# Altium PCB NewPCB1.PcbDoc (part 1 of 2)
Units mil, origin at the board's own origin, x right, y up, seen from the top; angles counter-clockwise.
Board outline 6000 x 4000 mil, 2 copper layers (Top Layer, Bottom Layer); 429 components, 190 nets, 1158 pads, 636 vias.
Unrouted connection lines stored in the file: 845.
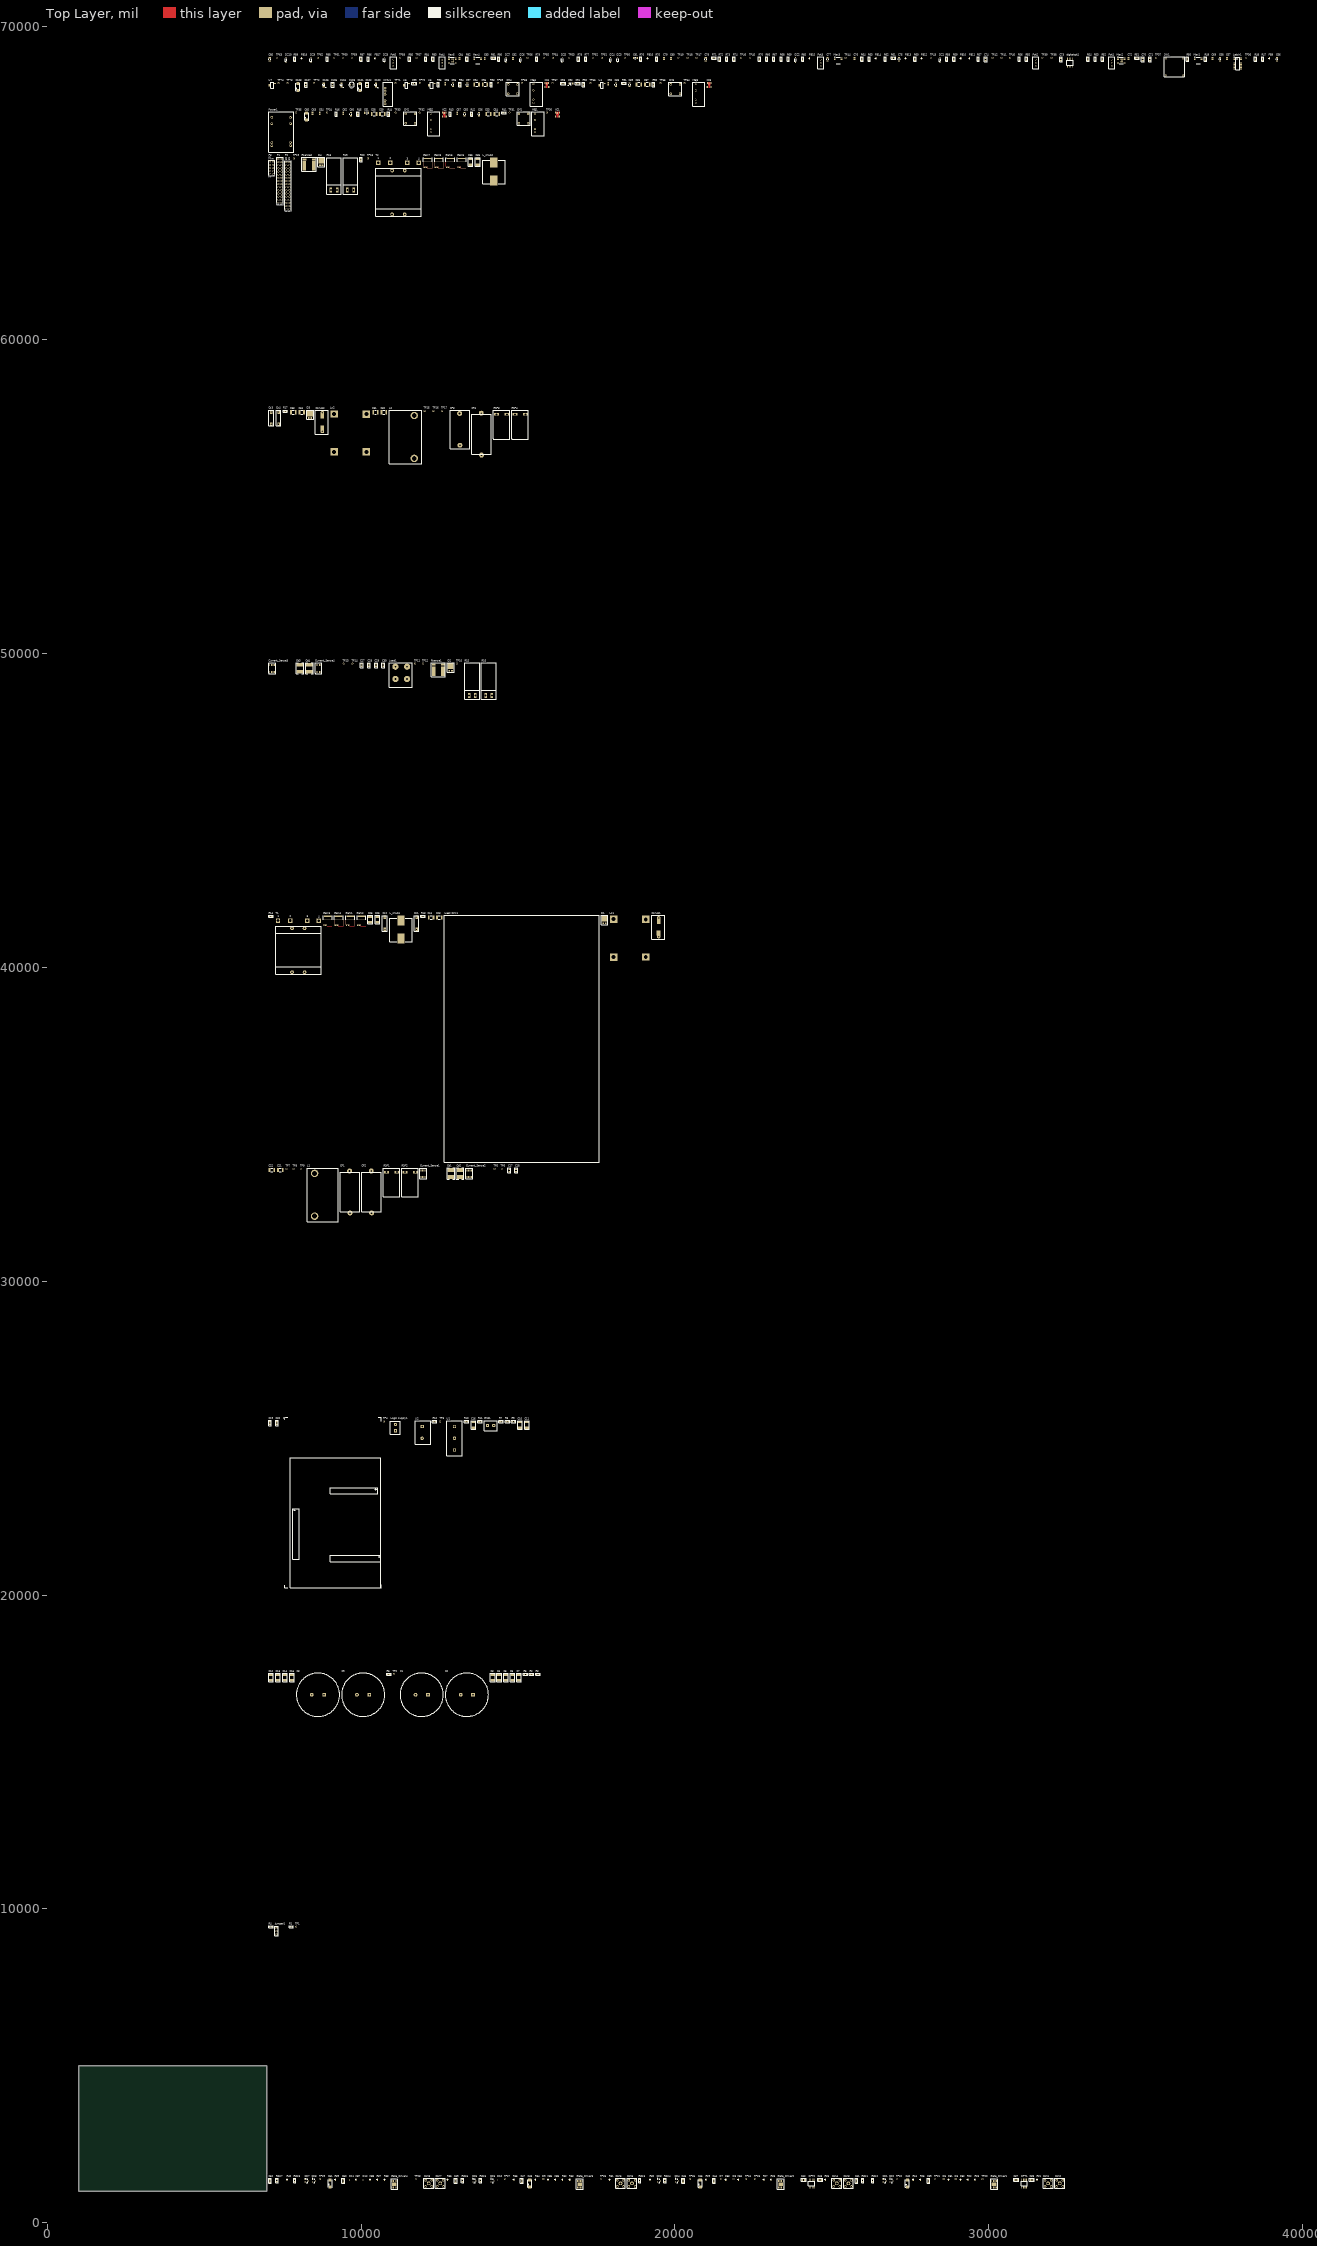
[diagram p0: Top Layer view]
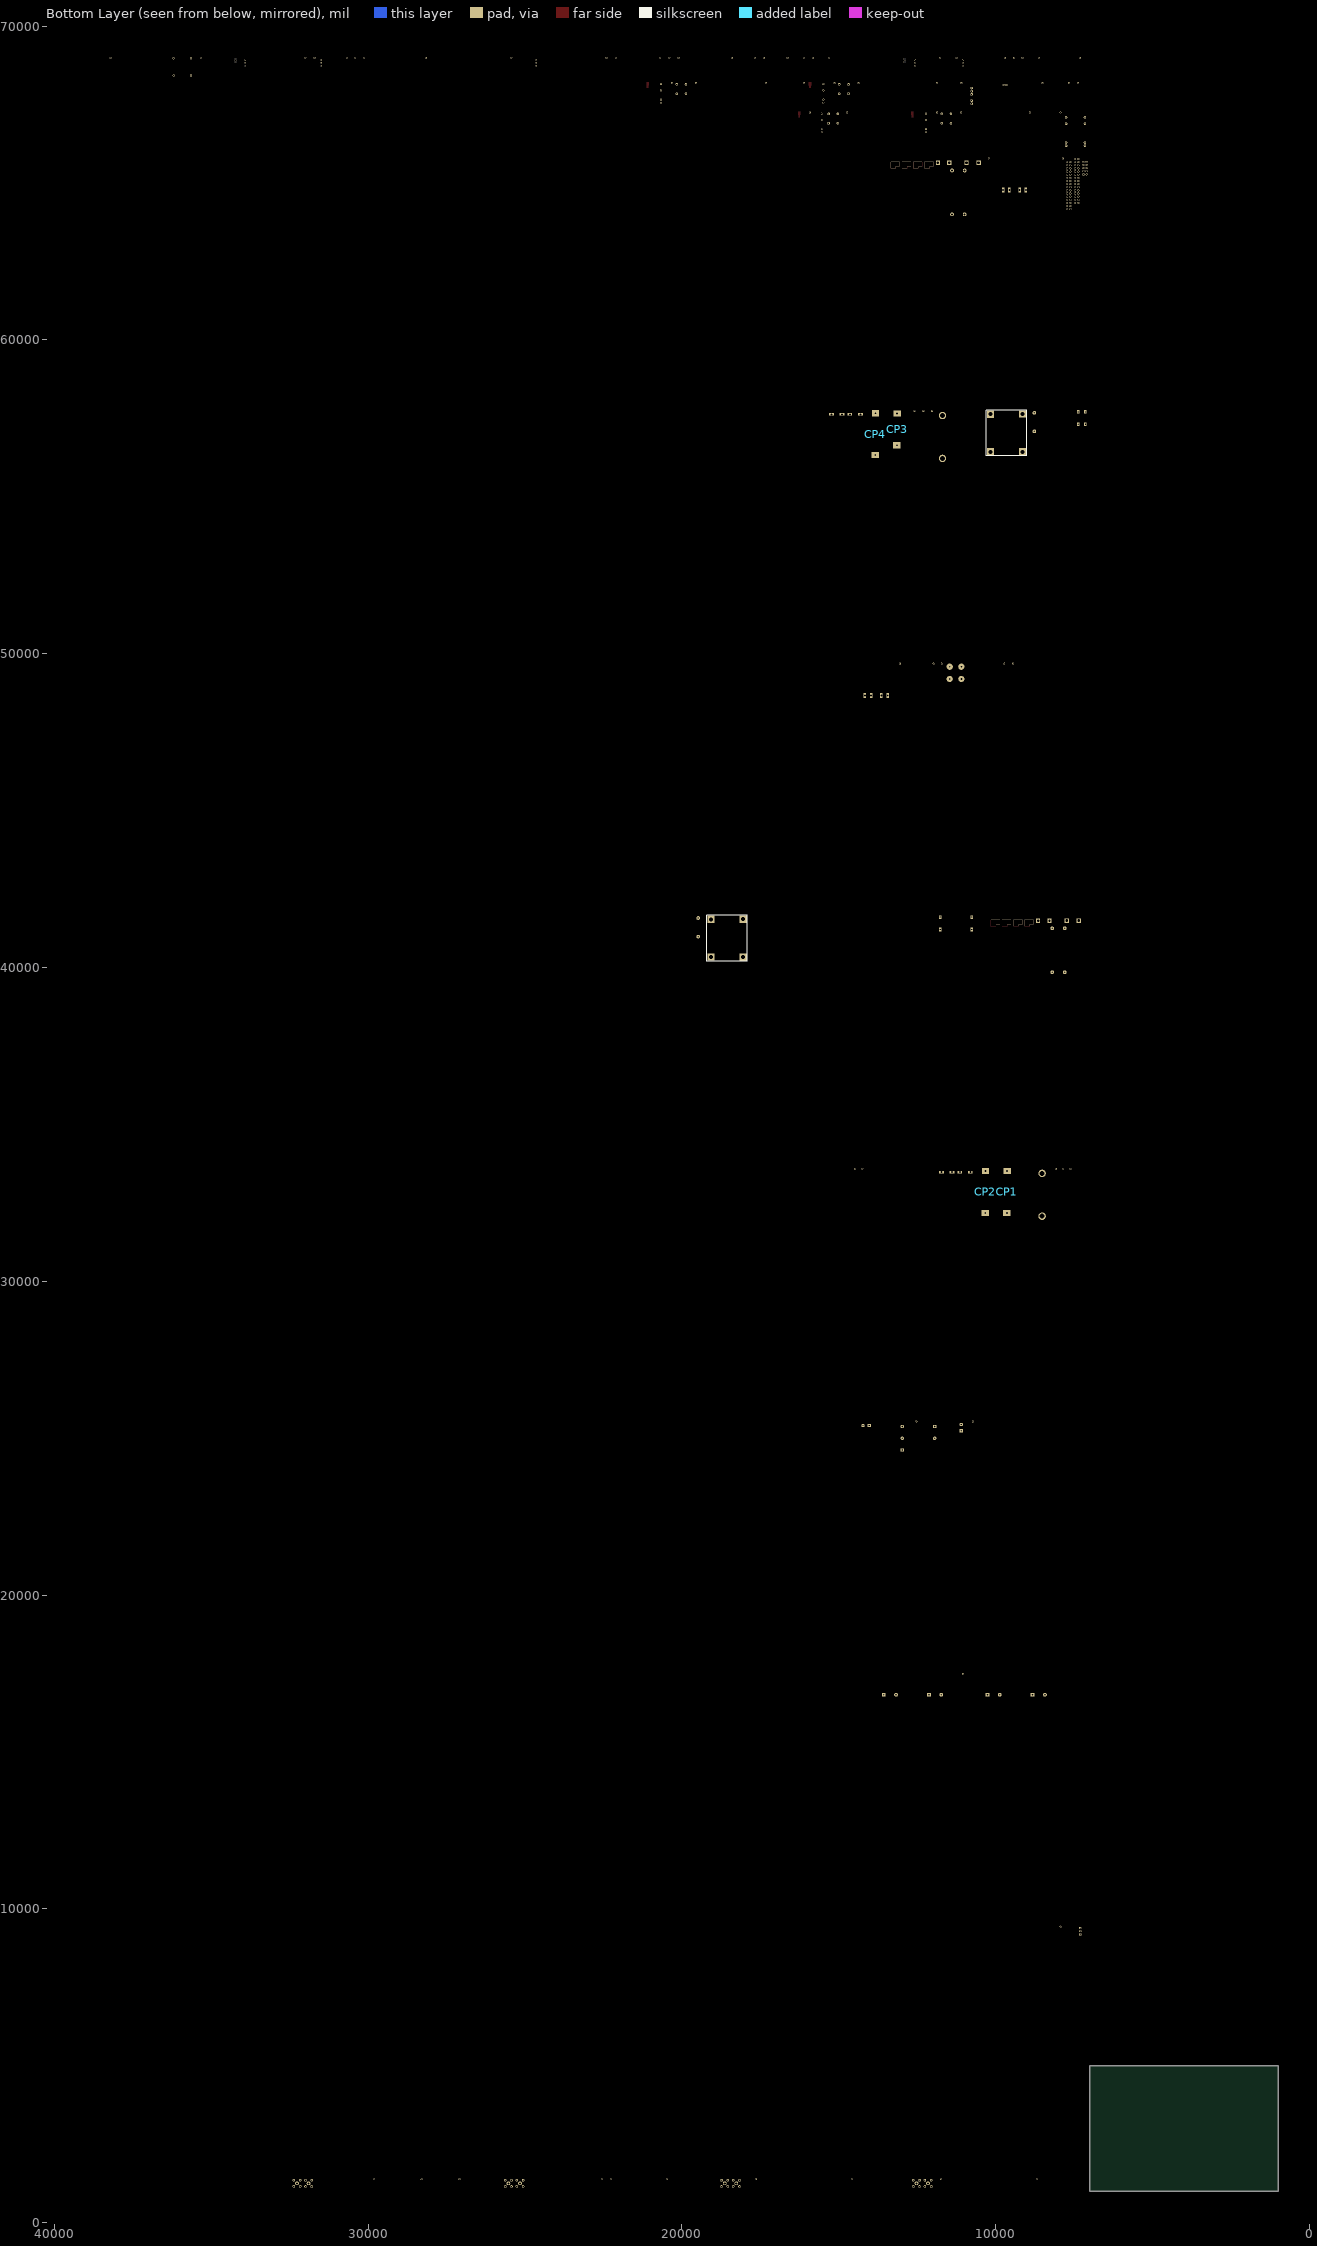
[diagram p1: Bottom Layer view, seen from below]

## Layer stack, top to bottom
Top Solder: solder mask 0.4, Solder Resist, Dk 3.5
Top Layer: signal copper 1.4
Dielectric 1: dielectric 12.6, FR-4, Dk 4.8
Bottom Layer: signal copper 1.4
Bottom Solder: solder mask 0.4, Solder Resist, Dk 3.5

## Board outline
1000,1000 7000,1000 7000,5000 1000,5000

## Design rules (kind name [scope] priority, off if disabled: settings)
Clearance [All] p1: gap=10 ignorepadtopadclearanceinfootprint=FALSE except(0: Arc-Hole Track-Hole SMDPad-Hole THPad-Hole Via-Hole Fill-Hole Poly-Hole Region-Hole Text-Hole)
PolygonConnect [All] p1: connectstyle=Relief reliefconductorwidth=10 reliefentries=4 polygonreliefangle="90 Angle" airgapwidth=10
RoomDefinition Protection_logic [InComponentClass('Protection_logic')] p1: confinementstyle=ConfineIn formatcopy=TRUE lockcomponents=FALSE outline 7045,68375 39340,68375 39340,69130 7045,69130
RoomDefinition Power_Supply [InComponentClass('Power_Supply')] p2: confinementstyle=ConfineIn formatcopy=TRUE lockcomponents=FALSE outline 7045,65975 16350,65975 16350,67385 7045,67385
RoomDefinition Power_Supply2 [InComponentClass('Power_Supply2')] p3: confinementstyle=ConfineIn formatcopy=TRUE lockcomponents=FALSE outline 7045,67430 21200,67430 21200,68325 7045,68325
RoomDefinition Power_Board [InComponentClass('Power_Board')] p4: confinementstyle=ConfineIn formatcopy=TRUE lockcomponents=FALSE outline 7045,9130 19685,9130 19685,65925 7045,65925
RoomDefinition Gate_Drivers [InComponentClass('Gate_Drivers')] p5: confinementstyle=ConfineIn formatcopy=TRUE lockcomponents=FALSE outline 7045,1055 32430,1055 32430,1525 7045,1525
RoutingVias [All] p1: holewidth=28 width=50 viastyle="Through Hole" minholewidth=28 minwidth=50 maxholewidth=28 maxwidth=50
SolderMaskExpansion [All] p1: expansion=4
Width [All] p1: maxlimit=10 minlimit=10 preferedwidth=10
30 further rules are at their usual default settings.

## Classes and differential pairs
component class Protection_logic: 2 3 C66 C67 C68 C69 C70 C71 C72 C73 C74 C75 C76 C77 C78 C79 C80 C81 C82 C83 C84 C85 digitalopt1 DZ1 DZ2 DZ3 DZ4 DZ5 DZ6 DZ7 DZ8 DZ9 DZ10 FB9 FB10 FB11 FB12 FB13 FB14 FB15 FB16 FB17 FB18 Latch1 Max1 Max2 Max3 Max4 Max5 Pot1 Pot2 Pot3 Pot4 Pot5 R47 R48 R49 R50 R51 R52 R53 R54 R55 R56 R57 R58 R59 R60 R61 R62 R63 R64 R65 R66 R67 R68 R69 R70 R71 R72 R73 R74 R75 R76 R77 R78 R79 R80 R81 R82 R83 R84 R85 R86 R87 R88 R89 SW1 TP36 TP37 TP38 TP39 TP40 TP41 TP42 TP43 TP44 TP45 TP46 TP47 TP48 TP49 TP50 TP51 TP52 TP53 TP54 TP55 TP56 TP57 TP58 TP59 TP60 TP61 TP62 TP63 U3
component class Power_Supply: C53 C54 C55 C56 C57 C58 C59 C60 C61 C62 C63 C64 C65 CM1 CM2 MEJ1 MEJ2 Power1 R41 R42 R43 R44 R45 R46 TP30 TP31 TP32 TP33 TP34 TP35 XC1 XC2
component class Power_Supply2: C86 C87 C88 C89 C90 C91 C92 C93 C94 C95 C96 C97 C98 C99 C100 C101 C102 C103 C104 C105 C106 C107 C108 CM3 CM4 MEJ3 MEJ4 NMH1 R90 R91 R92 R93 R94 R95 TP64 TP65 TP66 TP67 TP68 TP69 TP70 TP71 TP72 TP73 TP74 U4 U5 U6 U7 XC3 XC4
component class Power_Board: 1 C1 C2 C3 C4 C5 C6 C7 C8 C9 C10 C11 C12 C13 C14 C15 C16 C17 C18 C19 C20 C21 C22 C23 C24 C25 C26 C27 C28 C29 C30 C31 C32 C33 C34 C35 C36 Cd1 Cd2 Cd3 Cd4 CP1 CP2 CP3 CP4 Cs1 Cs2 Cs3 Cs4 Csnub1 Csnub2 Current_Sense1 Current_Sense2 Current_Sense3 Current_Sense4 D1 D2 D3 D4 GaN1 GaN2 GaN3 GaN4 GaN5 GaN6 GaN7 GaN8 Grid1 "Heat Sink1" Jumper1 L1 L2 L_snub1 L_snub2 Load1 "Logic supply1" Ls1 Ls2 P1 P2 P3 R1 R2 R3 R4 R5 R6 R7 R8 R9 R10 R11 R12 R13 R14 R15 R16 R17 R18 R19 R20 Rsense1 Rsense2 RSP1 RSP2 RSP3 RSP4 T1 T2 TP1 TP2 TP3 TP4 TP5 TP6 TP7 TP8 TP9 TP10 TP11 TP12 TP13 TP14 TP15 TP16 TP17 TP18 TP19 U1 U2
component class Gate_Drivers: C37 C38 C39 C40 C41 C42 C43 C44 C45 C46 C47 C48 C49 C50 C51 C52 Con1 Con2 Con3 Con4 Con5 Con6 Con7 Con8 D5 D6 D7 D8 D9 D10 D11 D12 FB1 FB2 FB3 FB4 FB5 FB6 FB7 FB8 Gate_Driver1 Gate_Driver2 Gate_Driver3 Gate_Driver4 OPT1 OPT2 R21 R22 R23 R24 R25 R26 R27 R28 R29 R30 R31 R32 R33 R34 R35 R36 R37 R38 R39 R40 Rdis1 Rdis2 Rdis3 Rdis4 Rdis5 Rdis6 Rdis7 Rdis8 TP20 TP21 TP22 TP23 TP24 TP25 TP26 TP27 TP28 TP29 ZD1 ZD2 ZD3 ZD4 ZD5 ZD6 ZD7 ZD8

## Components (designator, comment, footprint, x,y, rotation, side; value= is the part's Value field where it differs from the comment)
1 "Control Board" "Control Board" 9015,21065 r0 top
C1 "3300uF" "Cap_3300uF_35mm height" 11735,16825 r0 top
C2 "3300uF" "Cap_3300uF_35mm height" 13175,16825 r0 top
C3 "Output_cap" "Output cap" 14185,17380 r0 top
C4 "Output_cap" "Output cap" 14395,17380 r0 top
C5 "Output_cap" "Output cap" 14605,17380 r0 top
C6 "Output_cap" "Output cap" 14815,17380 r0 top
C7 "Output_cap" "Output cap" 15025,17380 r0 top
C8 "3300uF" "Cap_3300uF_35mm height" 8430,16825 r0 top
C9 "3300uF" "Cap_3300uF_35mm height" 9870,16825 r0 top
C10 "Output_cap" "Output cap" 15055,25430 r0 top
C11 "Output_cap" "Output cap" 15275,25430 r0 top
C12 "Output_cap" "Output cap" 7120,17380 r0 top
C13 "Output_cap" "Output cap" 7345,17380 r0 top
C14 "Output_cap" "Output cap" 7565,17380 r0 top
C15 "Output_cap" "Output cap" 7785,17380 r0 top
C16 "Output_cap" "Output cap" 13570,25430 r0 top
C17 "100nF" Cap_SMD 14725,33530 r0 top
C18 "100nF" Cap_SMD 14945,33530 r0 top
C19 "100nF" Cap_SMD 7100,25480 r0 top
C20 "100nF" Cap_SMD 7320,25480 r0 top
C21 "Cap Pol3" 1812 7430,33545 r0 top value=0.1uF/1k
C22 "Cap Pol3" 1812 7160,33545 r0 top value="0.1uF/ 1k"
C23 "Cap Pol3" 1812 12495,41595 r0 top value=0.1uF/1k
C24 "Cap Pol3" 1812 12230,41595 r0 top value=0.1uF/1K
C25 "Output_cap" "Output cap" 10285,41530 r0 top
C26 "Output_cap" "Output cap" 10515,41530 r0 top
C27 "100nF" Cap_SMD 10020,49630 r0 top
C28 "100nF" Cap_SMD 10250,49630 r0 top
C29 "100nF" Cap_SMD 10480,49630 r0 top
C30 "100nF" Cap_SMD 10710,49630 r0 top
C31 "Cap Pol3" 1812 10460,57695 r0 top value=100pF
C32 "Cap Pol3" 1812 10725,57695 r0 top value=100pF
C33 "Cap Pol3" 1812 7840,57695 r0 top value=100pF
C34 "Cap Pol3" 1812 8110,57695 r0 top value=100pF
C35 "Output_cap" "Output cap" 13710,65680 r0 top
C36 "Output_cap" "Output cap" 13480,65680 r0 top
C37 "Cap" "Capacitor 0805" 30875,1370 r0 top value=470nF
C38 "Cap" "Capacitor 0805" 31375,1370 r0 top value=470nF
C39 "100nF" Cap_SMD 28080,1330 r0 top
C40 "22uF" Cap_tantalum 27405,1240 r0 top
C41 "100nF" Cap_SMD 25790,1330 r0 top
C42 "Cap" "Capacitor 0805" 24105,1370 r0 top value=470nF
C43 "Cap" "Capacitor 0805" 24625,1370 r0 top value=470nF
C44 "100nF" Cap_SMD 21245,1330 r0 top
C45 "22uF/25V" Cap_tantalum 20805,1240 r0 top
C46 "100nF" Cap_SMD 20265,1330 r0 top
C47 "100nF" Cap_SMD 15125,1330 r0 top
C48 "22uF" Cap_tantalum 15370,1240 r0 top
C49 "100nF" Cap_SMD 13015,1330 r0 top
C50 "100nF" Cap_SMD 9435,1330 r0 top
C51 "22uF" Cap_tantalum 9010,1240 r0 top
C52 "100nF" Cap_SMD 7100,1330 r0 top
C53 "16V" 1812 14060,67205 r0 top value=10uF
C54 "Cap Pol3" 1812 14325,67205 r0 top value=10uF/16V
C55 "16V" C1206 13300,67195 r90 top value=10uF
C56 "Cap Semi" C1206 13760,67195 r90 top value=0.22uF/25V
C57 "Cap Pol3" C0805 13065,67220 r90 top value="1uF/ 25V"
C58 "Cap Pol3" 1812 10415,67205 r0 top value="10uF/ 16V"
C59 "Cap Pol3" 1812 10680,67205 r0 top value=10uF/16V
C60 "Cap Semi" C1206 9675,67195 r90 top value=10uF/16V
C61 "Cap Semi" C1206 10175,67240 r0 top value=0.22uF/25V
C62 "Cap Pol3" C0805 9435,67220 r90 top value="1uF/ 25V"
C63 "Cap Pol3" C0805 8455,67220 r90 top value="470nF/ 100V"
C64 "Cap Pol3" C0805 8685,67220 r90 top value=1uF/25V
C65 "22uF" Cap_tantalum 8260,67100 r0 top
C66 "16V" C1206 39190,68940 r90 top value=1nF
C67 "Cap Pol3" C0805 37595,68965 r90 top value="0.1uF/ 16V"
C68 "16V" C1206 37370,68940 r90 top value=1nF
C69 "Cap Pol3" C0805 37135,68965 r90 top value="0.1uF/ 16V"
C70 "100nF" Cap_SMD 34910,68935 r0 top
C71 "100nF" Cap_SMD 35140,68935 r0 top
C72 "Cap Pol3" C0805 34455,68965 r90 top value="0.1uF/ 16V"
C73 "100nF" Cap_SMD 32305,68935 r0 top
C74 "100nF" Cap_SMD 29905,68935 r0 top
C75 "16V" C1206 27145,68940 r90 top value=1nF
C76 "Cap Pol3" C0805 25725,68965 r90 top value="0.1uF/ 16V"
C77 "16V" C1206 24870,68940 r90 top value=0.1uF
C78 "16V" C1206 20985,68940 r90 top value=0.1uF
C79 "Cap Pol3" C0805 19650,68965 r90 top value="0.1uF/ 16V"
C80 "Cap Pol3" C0805 19880,68965 r90 top value="0.1uF/ 16V"
C81 "16V" C1206 18745,68985 r0 top value=1nF
C82 "Cap Pol3" C0805 14845,68965 r90 top value="0.1uF/ 16V"
C83 "Cap Pol3" C0805 13945,68965 r90 top value="0.1uF/ 16V"
C84 "Cap Pol3" C0805 13140,68965 r90 top value="0.1uF/ 16V"
C85 "16V" C1206 7090,68940 r90 top value=1nF
C86 "Cap Pol3" 1812 18855,68145 r0 top value="10uF/ 16V"
C87 "Cap Pol3" 1812 19125,68145 r0 top value=10uF/16V
C88 "Cap Semi" C1206 18120,68135 r90 top value=10uF/16V
C89 "Cap Semi" C1206 18560,68135 r90 top value=0.22uF/25V
C90 "Cap Pol3" C0805 17880,68160 r90 top value="1uF/ 25V"
C91 "Cap" "Capacitor 0805" 16910,68170 r0 top value=470nF
C92 "Tantalium/T520A226M006ATE090" "Cap Tantal 3216" 16680,68170 r0 top value=22uF
C93 "Cap" "Capacitor 0805" 16440,68170 r0 top value=470nF
C94 "Cap Pol3" 1812 13680,68145 r0 top value="10uF/ 16V"
C95 "Cap Pol3" 1812 13950,68145 r0 top value=10uF/16V
C96 "Cap Semi" C1206 12925,68135 r90 top value=10uF/16V
C97 "Cap Semi" C1206 13385,68135 r90 top value=0.22uF/25V
C98 "Cap Pol3" C0805 12685,68160 r90 top value="1uF/ 25V"
C99 "Cap" "Capacitor 0805" 11700,68170 r0 top value=470nF
C100 "Tantalium/T520A226M006ATE090" "Cap Tantal 3216" 10475,68120 r90 top value=22uF
C101 "Tantalium" "Cap tantal 22u-25V" 9960,68055 r90 top value=22uF
C102 "Cap" "Capacitor 0805" 10195,68135 r90 top value=470nF
C103 "electrolytic" CAP-10u-16V 9650,68125 r0 top value=10uF
C104 "Tantalium/T520A226M006ATE090" "Cap Tantal 3216" 9375,68120 r90 top value=22uF
C105 "Cap" "Capacitor 0805" 9095,68135 r90 top value=470nF
C106 "Tantalium/T520A226M006ATE090" "Cap Tantal 3216" 8815,68120 r90 top value=22uF
C107 "Cap" "Capacitor 0805" 8245,68135 r90 top value=470nF
C108 "Tantalium" "Cap tantal 22u-25V" 7985,68055 r90 top value=22uF
Cd1 "15uF" Cd 12865,33435 r0 top
Cd2 "15uF" Cd 13165,33435 r0 top
Cd3 "15uF" Cd 8060,49535 r0 top
Cd4 "Cd" Cd 8360,49535 r0 top
CM1 "CMC-08" CMC-08 15165,67025 r0 top
CM2 "CMC-08" CMC-08 11560,67025 r0 top
CM3 "CMC-08" CMC-08 20005,67965 r0 top
CM4 "CMC-08" CMC-08 14825,67965 r0 top
Con1 "Component_1" PCBComponent_1 31895,1255 r0 top
Con2 "Component_1" PCBComponent_1 32265,1255 r0 top
Con3 "pcb CONNECTOR" PCB_CONNECTOR 25530,1255 r0 top
Con4 "Component_1" PCBComponent_1 25160,1255 r0 top
Con5 "Component_1" PCBComponent_1 18265,1255 r0 top
Con6 "Component_1" PCBComponent_1 18635,1255 r0 top
Con7 "pcb CONNECTOR" PCB_CONNECTOR 12525,1255 r0 top
Con8 "Component_1" PCBComponent_1 12155,1255 r0 top
CP1 "Cap_CP" Cap_cp 9640,32795 r90 top
CP2 "Cap_CP" Cap_cp 10330,32795 r90 top
CP3 "Cap_CP" "Cap_cp - small" 13145,57105 r90 top
CP4 "Cap_CP" Cap_cp 13835,56945 r90 top
Cs1 "990pF" Cap-Cs 11780,41395 r90 top
Cs2 "560p" Cap-Cs 10770,41395 r90 top
Cs3 "560pF" Cap-Cs 7150,57495 r90 top
Cs4 "Cap cdv16ff101j03" Cap-Cs 7380,57495 r90 top
Csnub1 "Cap DPPM10S22K-F" Cap-Csnub 19460,41245 r90 top
Csnub2 "Cap DPPM10S22K-F" Cap-Csnub 8745,57345 r90 top
Current_Sense1 "ACS712-05" SOIC-8 12000,33395 r90 top
Current_Sense2 "ACS712-05" SOIC-8 13460,33395 r90 top
Current_Sense3 "ACS712-05" SOIC-8 7180,49495 r90 top
Current_Sense4 "ACS712-05" SOIC-8 8660,49495 r90 top
D1 "Diode" TO-277A 17755,41560 r0 top
D2 "Diode" TO-277A 12855,49610 r0 top
D3 "Diode" TO-277A 8375,57660 r0 top
D4 "Diode" TO-277A 8730,65710 r0 top
D5 "PMEG2010EPK" PMEG2010EPK 28535,1385 r0 top
D6 "PMEG2010EPK" PMEG2010EPK 28915,1385 r0 top
D7 "PMEG2010EPK" PMEG2010EPK 21430,1385 r0 top
D8 "PMEG2010EPK" PMEG2010EPK 21830,1385 r0 top
D9 "PMEG2010EPK" PMEG2010EPK 15770,1385 r0 top
D10 "PMEG2010EPK" PMEG2010EPK 14370,1340 r90 top
D11 "PMEG2010EPK" PMEG2010EPK 9645,1340 r90 top
D12 "PMEG2010EPK" PMEG2010EPK 10075,1340 r90 top
digitalopt1 "Dig opto SI8421BB-D-IS" "SO8 TS27l2" 32590,68835 r90 top
DZ1 "MMSZ5221BS" MMSZ5221BS 28450,68845 r90 top
DZ2 "MMSZ5221BS" MMSZ5221BS 23845,68845 r90 top
DZ3 "MMSZ5221BS" MMSZ5221BS 18180,68845 r90 top
DZ4 "MMSZ5221BS" MMSZ5221BS 17950,68845 r90 top
DZ5 "MMSZ5221BS" MMSZ5221BS 16410,68845 r90 top
DZ6 "MMSZ5221BS" MMSZ5221BS 15080,68845 r90 top
DZ7 "MMSZ5221BS" MMSZ5221BS 14620,68845 r90 top
DZ8 "MMSZ5221BS" MMSZ5221BS 10740,68845 r90 top
DZ9 "MMSZ5221BS" MMSZ5221BS 8400,68845 r90 top
DZ10 "MMSZ5221BS" MMSZ5221BS 7610,68845 r90 top
FB1 "Res3" J1-0603 28725,1370 r90 top value=1K
FB2 "Res3" J1-0603 29105,1370 r90 top value=1K
FB3 "Res3" J1-0603 21620,1370 r90 top value=1K
FB4 "Res3" J1-0603 22025,1370 r90 top value=1K
FB5 "Res3" J1-0603 15960,1370 r90 top value=1K
FB6 "Res3" J1-0603 16190,1370 r90 top value=1K
FB7 "Res3" J1-0603 9840,1370 r90 top value=1K
FB8 "Res3" J1-0603 10290,1370 r90 top value=1K
FB9 "Res3" J1-0603 38945,68975 r90 top value=1K
FB10 "Res3" J1-0603 29110,68975 r90 top value=1K
FB11 "Res3" J1-0603 29390,68975 r90 top value=1K
FB12 "Res3" J1-0603 27865,68975 r90 top value=1K
FB13 "Res3" J1-0603 27355,68975 r90 top value=1K
FB14 "Res3" J1-0603 26405,68975 r90 top value=1K
FB15 "Res3" J1-0603 24290,68975 r90 top value=1K
FB16 "Res3" J1-0603 19130,68975 r90 top value=1K
FB17 "Res3" J1-0603 10445,68975 r90 top value=1K
FB18 "Res3" J1-0603 8105,68975 r90 top value=1K
GaN1 "GS66508B" GS66508B 9655,41485 r0 top
GaN2 "GS66508B" GS66508B 10015,41485 r0 top
GaN3 "GS66508B" GS66508B 8935,41485 r0 top
GaN4 "GS66508B" GS66508B 9295,41485 r0 top
GaN5 "GS66508B" GS66508B 12845,65635 r0 top
GaN6 "GS66508B" GS66508B 13205,65635 r0 top
GaN7 "GS66508B" GS66508B 12130,65635 r0 top
GaN8 "GS66508B" GS66508B 12485,65635 r0 top
Gate_Driver1 "IXDN609SI" "Gate driver _low side" 30165,1220 r90 top
Gate_Driver2 "IXDN609SI" "Gate driver _low side" 23370,1220 r90 top
Gate_Driver3 "IXDN609SI" "Gate driver _low side" 16960,1220 r90 top
Gate_Driver4 "IXDN609SI" "Gate driver _low side" 11055,1220 r90 top
Grid1 "Grid Input for sense" "Auxlilary connector" 14030,25405 r0 top
"Heat Sink1" "Heat sink" "Heat Sink" 17585,33790 r90 top
Jumper1 "p_jumper" Header1*3 7310,9190 r90 top
L1 "inductor" Inductor_small 8540,32755 r90 top
L2 "inductor" Inductor_small_mirror 11410,56915 r90 top
L_snub1 "Inductor smd" "Inductor surface mount" 11280,41220 r90 top
L_snub2 "Inductor smd" "Inductor surface mount" 14240,65370 r90 top
Latch1 "SR NOR Latch" "SR latch" 37935,68805 r0 top
Load1 "Connector 60A" Connector_60A 11635,48925 r0 top
"Logic supply1" "Auxilary connector" "Auxlilary connector" 11095,25240 r90 top
Ls1 "Inductor_output" "Inductor output" 18530,40905 r90 top
Ls2 "Inductor_output" "Inductor output" 9625,57005 r90 top
Max1 "Comparator MAX942" "SOIC 8_ no EP" 36675,68905 r0 top
Max2 "Diffrential Amp MAX9919" SOIC127P600X168_HS-9N 34225,68905 r0 top
Max3 "Comparator MAX942" "SOIC 8_ no EP" 25205,68905 r0 top
Max4 "Comparator MAX942" "SOIC 8_ no EP" 13715,68905 r0 top
Max5 "Diffrential Amp MAX9919" SOIC127P600X168_HS-9N 12910,68905 r0 top
MEJ1 "MEJ2S1212SC" MEJ2 15640,66500 r90 top
MEJ2 "MEJ2S1212SC" MEJ2 12320,66500 r90 top
MEJ3 "MEJ2S1212SC" MEJ2 20765,67440 r90 top
MEJ4 "MEJ2S1212SC" MEJ2 15590,67440 r90 top
NMH1 "NMH1209SC" NMH1209SC 10765,67525 r90 top
OPT1 "Dig opto SI8421BB-D-IS" "SO8 TS27l2" 31130,1250 r90 top
OPT2 "Dig opto SI8421BB-D-IS" "SO8 TS27l2" 24355,1250 r90 top
P1 "Signals from DSP" HDR2X15 7465,64365 r90 top
P2 "Signals to DSP" HDR2X16 7720,64165 r90 top
P3 "Header 5X2" HDR2X5 7205,65275 r90 top
Pot1 "20K" Pot 33915,68730 r90 top
Pot2 "20K" Pot 31495,68730 r90 top
Pot3 "20K" Pot 24645,68730 r90 top
Pot4 "20K" Pot 12585,68730 r90 top
Pot5 "20K" Pot 11030,68730 r90 top
Power1 "NCS6S4812C" Power_main 7430,66665 r90 top
R1 "res_smd" res_smd 7775,9430 r0 top
R2 "res_smd" res_smd 15435,17480 r0 top
R3 "res_smd" res_smd 15635,17480 r0 top
R4 "res_smd" res_smd 7125,9430 r0 top
R5 "res_smd" res_smd 15240,17480 r0 top
R6 "res_smd" res_smd 10885,17480 r0 top
R7 "res_smd" res_smd 14465,25530 r0 top
R8 "res_smd" res_smd 14660,25530 r0 top
R9 "res_smd" res_smd 14860,25530 r0 top
R10 "res_smd" res_smd 13355,25530 r0 top
R11 "res_smd" res_smd 13795,25530 r0 top
R12 "res_smd" res_smd 12345,25530 r0 top
R13 "res_smd" res_smd 11975,41630 r0 top
R14 "res_smd" res_smd 7125,41630 r0 top
R15 "res_snubber" Res_Snub 13440,48675 r0 top
R16 "res_snubber" Res_Snub 13970,48675 r0 top
R17 "res_smd" res_smd 7585,57730 r0 top
R18 "res_snubber" Res_Snub 9035,64775 r0 top
R19 "res_snubber" Res_Snub 9565,64775 r0 top
R20 "res_smd" res_smd 9995,65745 r90 top
R21 "Res3" J1-0603 31545,1370 r90 top value=100
R22 "Res3" J1-0603 29335,1370 r90 top value=20
R23 "Res3" J1-0603 29565,1370 r90 top value=20
R24 "Res3" J1-0603 27595,1370 r90 top value=20
R25 "20" J1-0603 27825,1370 r90 top value=1K
R26 "Res3" J1-0603 24795,1370 r90 top value=100
R27 "Res3" J1-0603 22835,1370 r90 top value=20
R28 "Res3" J1-0603 23065,1370 r90 top value=20
R29 "Res3" J1-0603 20990,1370 r90 top value=20
R30 "20" J1-0603 19210,1370 r90 top value=1K
R31 "Res3" J1-0603 17920,1370 r90 top value=100
R32 "Res3" J1-0603 16420,1370 r90 top value=1K
R33 "Res3" J1-0603 16650,1370 r90 top value=1K
R34 "Res3" J1-0603 15560,1370 r90 top value=1K
R35 "Res3" J1-0603 14870,1370 r90 top value=1K
R36 "Res3" J1-0603 12760,1370 r90 top value=100
R37 "Res3" J1-0603 10520,1370 r90 top value=1K
R38 "Res3" J1-0603 10750,1370 r90 top value=1K
R39 "Res3" J1-0603 9180,1370 r90 top value=1K
R40 "Res3" J1-0603 7645,1370 r90 top value=1K
R41 "res_smd" res_smd 14560,67240 r0 top
R42 "res_smd" res_smd 13530,67205 r90 top
R43 "res_smd" res_smd 12840,67205 r90 top
R44 "res_smd" res_smd 10875,67205 r90 top
R45 "res_smd" res_smd 9900,67205 r90 top
R46 "res_smd" res_smd 9210,67205 r90 top
R47 "res_smd" res_smd 38730,68950 r90 top
R48 "res_smd" res_smd 38500,68950 r90 top
R49 "res_smd" res_smd 36910,68950 r90 top
R50 "res_smd" res_smd 36335,68950 r90 top
R51 "res_smd" res_smd 34725,68985 r0 top
R52 "res_smd" res_smd 33625,68950 r90 top
R53 "res_smd" res_smd 33395,68950 r90 top
R54 "res_smd" res_smd 33165,68950 r90 top
R55 "res_smd" res_smd 31205,68950 r90 top
R56 "res_smd" res_smd 30975,68950 r90 top
R57 "res_smd" res_smd 29665,68950 r90 top
R58 "res_smd" res_smd 28665,68950 r90 top
R59 "res_smd" res_smd 28895,68950 r90 top
R60 "res_smd" res_smd 27650,68950 r90 top
R61 "res_smd" res_smd 26965,68985 r0 top
R62 "res_smd" res_smd 26700,68950 r90 top
R63 "res_smd" res_smd 26190,68950 r90 top
R64 "res_smd" res_smd 25960,68950 r90 top
R65 "res_smd" res_smd 24075,68950 r90 top
R66 "res_smd" res_smd 22925,68950 r90 top
R67 "res_smd" res_smd 23155,68950 r90 top
R68 "res_smd" res_smd 23385,68950 r90 top
R69 "res_smd" res_smd 23615,68950 r90 top
R70 "res_smd" res_smd 22695,68950 r90 top
R71 "res_smd" res_smd 21250,68985 r0 top
R72 "res_smd" res_smd 21425,68950 r90 top
R73 "res_smd" res_smd 21655,68950 r90 top
R74 "res_smd" res_smd 21885,68950 r90 top
R75 "res_smd" res_smd 19425,68950 r90 top
R76 "res_smd" res_smd 18915,68950 r90 top
R77 "res_smd" res_smd 17160,68950 r90 top
R78 "res_smd" res_smd 16930,68950 r90 top
R79 "res_smd" res_smd 15600,68950 r90 top
R80 "res_smd" res_smd 14390,68950 r90 top
R81 "res_smd" res_smd 14215,68985 r0 top
R82 "res_smd" res_smd 13375,68950 r90 top
R83 "res_smd" res_smd 12295,68950 r90 top
R84 "res_smd" res_smd 12065,68950 r90 top
R85 "res_smd" res_smd 11545,68950 r90 top
R86 "res_smd" res_smd 10230,68950 r90 top
R87 "res_smd" res_smd 10000,68950 r90 top
R88 "res_smd" res_smd 8920,68950 r90 top
R89 "res_smd" res_smd 7890,68950 r90 top
R90 "res_smd" res_smd 19320,68145 r90 top
R91 "res_smd" res_smd 18380,68180 r0 top
R92 "res_smd" res_smd 17085,68145 r90 top
R93 "res_smd" res_smd 14145,68145 r90 top
R94 "res_smd" res_smd 13150,68145 r90 top
R95 "res_smd" res_smd 12460,68145 r90 top
Rdis1 "res_smd" res_smd 25990,1345 r90 top
Rdis2 "res_smd" res_smd 26310,1345 r90 top
Rdis3 "res_smd" res_smd 18885,1345 r90 top
Rdis4 "res_smd" res_smd 19685,1345 r90 top
Rdis5 "res_smd" res_smd 13235,1345 r90 top
Rdis6 "res_smd" res_smd 13805,1345 r90 top
Rdis7 "res_smd" res_smd 7320,1345 r90 top
Rdis8 "res_smd" res_smd 7890,1345 r90 top
Rsense1 "Sense Resistor" "Sense resistor" 12315,49445 r0 top
Rsense2 "Sense Resistor" "Sense resistor" 8195,65545 r0 top
RSP1 "Res_Rd" Res-RS 11035,33375 r0 top
RSP2 "Res_Rd" Res-RS 11620,33375 r0 top
RSP3 "15 ohm" Res-RS 14540,57525 r0 top
RSP4 "Res_Rd" Res-RS 15125,57525 r0 top
SW1 "PB- K5A2 4N AU" "Push Button _New" 35645,68425 r0 top
T1 "Transformer" Transformer 8050,40560 r0 top
T2 "Transformer" Transformer 11240,64710 r0 top
TP1 "Test Point" "Test Point" 7930,9435 r0 top
TP2 "Test Point" "Test Point" 11040,17485 r90 top
TP3 "Test point" "Test Point" 12525,25535 r90 top
TP4 "Test Point" "Test Point" 10730,25535 r90 top
TP5 "Test Point" "Test Point" 14250,33585 r90 top
TP6 "Test Point" "Test Point" 14480,33585 r90 top
TP7 "Test Point" "Test Point" 7620,33585 r90 top
TP8 "Test Point" "Test Point" 7850,33585 r90 top
TP9 "Test Point" "Test Point" 8080,33585 r90 top
TP10 "Test Point" "Test Point" 13050,49685 r90 top
TP11 "Test Point" "Test Point" 11720,49685 r90 top
TP12 "Test Point" "Test Point" 11980,49685 r90 top
TP13 "Test Point" "Test Point" 9445,49685 r90 top
TP14 "Test Point" "Test Point" 9725,49685 r90 top
TP15 "Test Point" "Test Point" 12025,57735 r90 top
TP16 "Test Point" "Test Point" 12305,57735 r90 top
TP17 "Test Point" "Test Point" 12585,57735 r90 top
TP18 "Test Point" "Test Point" 10220,65785 r90 top
TP19 "Test Point" "Test Point" 7860,65785 r90 top
TP20 "Test Point" "Test Point" 29805,1385 r90 top
TP21 "Test point" "Test Point" 28295,1385 r90 top
TP22 "Test Point" "Test Point" 27085,1385 r90 top
TP23 "Test Point" "Test Point" 22555,1385 r90 top
TP24 "Test point" "Test Point" 22265,1385 r90 top
TP25 "Test Point" "Test Point" 20480,1385 r90 top
TP26 "Test Point" "Test Point" 17640,1385 r90 top
TP27 "Test Point" "Test Point" 14590,1385 r90 top
TP28 "Test Point" "Test Point" 11740,1385 r90 top
TP29 "Test Point" "Test Point" 8690,1385 r90 top
TP30 "Test Point" "Test Point" 15920,67245 r90 top
TP31 "Test Point" "Test Point" 14730,67245 r90 top
TP32 "Test Point" "Test Point" 11865,67245 r90 top
TP33 "Test Point" "Test Point" 11100,67245 r90 top
TP34 "Test Point" "Test Point" 8915,67245 r90 top
TP35 "Test Point" "Test Point" 7935,67245 r90 top
TP36 "Test Point" "Test Point" 38205,68990 r90 top
TP37 "Test Point" "Test Point" 35335,68990 r90 top
TP38 "Test Point" "Test Point" 32000,68990 r90 top
TP39 "Test Point" "Test Point" 31710,68990 r90 top
TP40 "Test Point" "Test Point" 30680,68990 r90 top
TP41 "Test Point" "Test Point" 30410,68990 r90 top
TP42 "Test Point" "Test Point" 30120,68990 r90 top
TP43 "Test Point" "Test Point" 28155,68990 r90 top
TP44 "Test Point" "Test Point" 25435,68990 r90 top
TP45 "Test Point" "Test Point" 22400,68990 r90 top
TP46 "Test Point" "Test Point" 22110,68990 r90 top
TP47 "Test Point" "Test Point" 20690,68990 r90 top
TP48 "Test Point" "Test Point" 20400,68990 r90 top
TP49 "Test Point" "Test Point" 20110,68990 r90 top
TP50 "Test Point" "Test Point" 18405,68990 r90 top
TP51 "Test Point" "Test Point" 17675,68990 r90 top
TP52 "Test Point" "Test Point" 17385,68990 r90 top
TP53 "Test Point" "Test Point" 16635,68990 r90 top
TP54 "Test Point" "Test Point" 16115,68990 r90 top
TP55 "Test Point" "Test Point" 15825,68990 r90 top
TP56 "Test Point" "Test Point" 15305,68990 r90 top
TP57 "Test Point" "Test Point" 11770,68990 r90 top
TP58 "Test Point" "Test Point" 11245,68990 r90 top
TP59 "Test Point" "Test Point" 9705,68990 r90 top
TP60 "Test Point" "Test Point" 9415,68990 r90 top
TP61 "Test Point" "Test Point" 9145,68990 r90 top
TP62 "Test Point" "Test Point" 8625,68990 r90 top
TP63 "Test Point" "Test Point" 7315,68990 r90 top
TP64 "Test Point" "Test Point" 20310,68185 r90 top
TP65 "Test Point" "Test Point" 19545,68185 r90 top
TP66 "Test point" "Test Point" 17310,68185 r90 top
TP67 "Test point" "Test Point" 16100,68185 r90 top
TP68 "Test Point" "Test Point" 15135,68185 r90 top
TP69 "Test Point" "Test Point" 14370,68185 r90 top
TP70 "Test point" "Test Point" 11880,68185 r90 top
TP71 "Test point" "Test Point" 11095,68185 r90 top
TP72 "Test point" "Test Point" 8510,68185 r90 top
TP73 "Test point" "Test Point" 7660,68185 r90 top
TP74 "Test point" "Test Point" 7370,68185 r90 top
U1 "DC Input" "P-terminal 3" 12990,25010 r0 top
U2 "Jumper Vin" "P-Terminal 2" 11980,25175 r0 top
U4 "L78L05ABUTR" "Reg SOT-89 +5" 17600,68115 r0 top
U5 "L78L05ABUTR" "Reg SOT-89 +5" 12170,68115 r0 top
U6 "L78L05ABUTR" "Reg SOT-89 +5" 11365,68115 r0 top
U7 "L79L05ABUTR" "Reg SOT-89" 7085,68115 r0 top
XC1 "XC6216C202PR-G" SOT-89-5 16260,67195 r0 top
XC2 "XC6216C202PR-G" SOT-89-5 12655,67195 r0 top
XC3 "XC6216C202PR-G" SOT-89-5 21095,68135 r0 top
XC4 "XC6216C202PR-G" SOT-89-5 15920,68135 r0 top
ZD1 "8.2 v" "Zener Diode" 26690,1335 r0 top
ZD2 "8.2 v" "Zener Diode" 26900,1335 r0 top
ZD3 "8.2 v" "Zener Diode" 19495,1335 r0 top
ZD4 "8.2 v" "Zener Diode" 20065,1335 r0 top
ZD5 "8.2 v" "Zener Diode" 13610,1335 r0 top
ZD6 "8.2 v" "Zener Diode" 14185,1335 r0 top
ZD7 "8.2 v" "Zener Diode" 8270,1335 r0 top
ZD8 "8.2 v" "Zener Diode" 8500,1335 r0 top

## Footprints (in the part's own frame and the unit in brackets; to place one, negate y for a bottom-side part, rotate by r counter-clockwise, add the part's x,y. Pads: shape width x height; smd on the part's side, far side on the other; paste and mask are expansions set on the pad)
1812 [mm] "Chip Capacitor, Body 4.5x3.2mm, IPC High Density"
  rect 1.4x3.3 smd: 1(-1.9,0) 2(1.9,0)
  silkscreen extent -0.8,-1.55 0.8,1.55, body extent -2.4,-1.7 2.4,1.7, height 1.4
"Auxlilary connector" [mm]
  rect 2.75x2.75 hole 1.1: 1(-0.027,-0.016)
  round 2.75 hole 1.1: 2(5.048,-0.016)
  silkscreen extent -2.7,-4.08 7.71,4.05
C0805 [mm] "Chip Capacitor, Body 2.0x1.3mm, IPC High Density"
  rect 1.1x1.4 smd: 1(-0.75,0) 2(0.75,0)
  body extent -1.1,-0.72 1.1,0.72, height 1.4
C1206 [mm] "Chip Capacitor, Body 3.2x1.6mm, IPC High Density"
  rect 1.1x1.7 smd: 1(-1.35,0) 2(1.35,0)
  silkscreen extent -0.4,-0.75 0.4,0.75, body extent -1.7,-0.9 1.7,0.9, height 1.3
"Cap tantal 22u-25V" [mm]
  rect 2.5x2.5 smd: 1(-2.794,0) 2(2.794,0)
  silkscreen extent -3.05,-1.65 3.05,1.65
"Cap Tantal 3216" [mm]
  rect 1.25x1.85 smd: 1(-1.298,0) 2(1.552,0)
  silkscreen extent -2.16,-1.65 0.53,0.82, body extent -1.52,-0.9 1.78,0.9, height 1.6
CAP-10u-16V [mm]
  rect 1.5x1.5 hole 1: 1(0,0)
  round 1.5 hole 1: 2(2.54,0)
  silkscreen extent -0.93,-2.2 3.47,2.2
Cap-Cs [mm]
  rect 2x2 hole 1: 1(-4.674,0.254) 2(5.359,0.254)
  rect 3x2 smd: 1(-4.674,0.254) 2(5.279,0.254)
  rect 3x2 smd far side: 1(-4.674,0.254) 2(5.359,0.254)
  silkscreen extent -5.94,-1.65 6.5,2.29, body extent -6.28,-0.85 6.96,1.36, height 12.7
Cap-Csnub [mm]
  round 3 hole 1.1: 1(-6.607,-0.56) 2(8.421,-0.56)
  rect 4x3 smd: 1(-3.771,-0.433) 2(5.627,-0.56)
  silkscreen extent -8.85,-5.39 10.58,5.03, body extent -8.21,-2.16 10.02,1.04, height 13.77
"Cap_3300uF_35mm height" [mil]
  rect 120x120 hole 60: +(393.7,0)
  round 120 hole 60: -(0,0)
  silkscreen extent -492,-689 886,689, body extent -493,-690 885,688, height 1378
Cap_cp [mm]
  round 4 hole 1.5: 1(18.263,0.127) 2(-15.646,-0.127)
  rect 5x6 smd far side: 1(18.263,0.127) 2(-15.646,-0.127)
  silkscreen extent -14.76,-8.13 17.25,7.87, body extent -14.88,-8.26 17.37,8, height 22.78
"Cap_cp - small" [mm]
  round 4 hole 1.5: 1(13.975,0.125) 2(-11.746,-0.127)
  rect 5x6 smd far side: 1(13.975,0.125) 2(-11.746,-0.127)
  silkscreen extent -14.5,-8.13 16.68,7.87, body extent -14.35,-8.26 16.5,8, height 22.78
Cap_SMD [mm]
  rect 1.7x1.3 smd: 1(0,-0.889) 2(0,1.143)
  silkscreen extent -1.14,-1.91 1.14,2.16
Cap_tantalum [mm]
  rect 2.5x2.5 smd: 1(0.127,-2.413) 2(0.127,3.175)
  silkscreen extent -1.52,-2.67 1.78,3.43, body extent -1.65,-2.79 1.91,3.56, height 3.3
"Capacitor 0805" [mm]
  rect 1.3x1.7 smd: 1(-1.016,0) 2(1.016,0)
  silkscreen extent -2.03,-1.14 2.03,1.14
Cd [mil]
  rect 216.54x118.11 smd: 1(-5,-110) 2(-5,110)
  silkscreen extent -125,-180 115,180
CMC-08 [mil] "common mode coke"
  round 78.74 hole 30: 1(160,-120) 2(160,180) 3(-135,180) 4(-135,-120)
  silkscreen extent -195,-185 220,245
Connector_60A [mm]
  round 5 hole 1.5: 1(-13.716,6.858) 1(-13.716,16.764) 2(-4.318,6.858) 2(-4.318,16.764)
  silkscreen extent -18.67,0 0,19.94, body extent -18.8,-0.13 0.13,20.07, height 29.46
"Control Board" [mil]
  silkscreen extent -1444,-831 1630,4597, body extent -1444,-1037 1630,4597, height 2000
"Gate driver _low side" [mm]
  rect 1.55x0.6 smd: 1(-2.55,1.7) 2(-2.55,0.425) 3(-2.55,-0.85) 4(-2.55,-2.125) 5(2.85,-2.125) 6(2.85,-0.85) 7(2.85,0.425) 8(2.85,1.7)
  rect 2.74x3.8 smd: 4(0.15,-0.175)
  silkscreen extent -3.93,-2.95 4.65,2.55
GS66508B [mm] "30A, 650V bottom side cooled"
  rect 6.1x1.1 smd: D(-0.05,3.655)
  rect 1.1x1.1 smd: G(-2.98,-3.605) S(-0.05,-0.377) SS(-1.47,-3.605)
  Top Layer region: -3.525,0.5 3.425,0.5 3.425,-4.15 -0.525,-4.15 -0.525,-2.65 -3.525,-2.65
  silkscreen extent -3.65,1.03 3.55,4.33, body extent -3.55,-4.17 3.45,4.23, height 0.5
HDR2X5 [mm] "Connector; Header; 5x2 Position"
  rect 1.5x1.5 hole 0.9: 1(0,0)
  round 1.5 hole 0.9: 2(0,2.54) 3(2.54,0) 4(2.54,2.54) 5(5.08,0) 6(5.08,2.54) 7(7.62,0) 8(7.62,2.54) 9(10.16,0) 10(10.16,2.54)
  silkscreen extent -1.27,-1.27 11.43,3.81
HDR2X15 [mm] "Connector; Header; 15x2 Position"
  rect 1.5x1.5 hole 0.9: 1(0,0)
  round 1.5 hole 0.9: 2(0,2.54) 3(2.54,0) 4(2.54,2.54) 5(5.08,0) 6(5.08,2.54) 7(7.62,0) 8(7.62,2.54) 9(10.16,0) 10(10.16,2.54) 11(12.7,0) 12(12.7,2.54) 13(15.24,0) 14(15.24,2.54) 15(17.78,0) 16(17.78,2.54) 17(20.32,0) 18(20.32,2.54) 19(22.86,0) 20(22.86,2.54) 21(25.4,0) 22(25.4,2.54) 23(27.94,0) 24(27.94,2.54) 25(30.48,0) 26(30.48,2.54) 27(33.02,0) 28(33.02,2.54) 29(35.56,0) 30(35.56,2.54)
  silkscreen extent -1.27,-1.27 36.83,3.81
HDR2X16 [mm] "Connector; Header; 16x2 Position"
  rect 1.5x1.5 hole 0.9: 1(0,0)
  round 1.5 hole 0.9: 2(0,2.54) 3(2.54,0) 4(2.54,2.54) 5(5.08,0) 6(5.08,2.54) 7(7.62,0) 8(7.62,2.54) 9(10.16,0) 10(10.16,2.54) 11(12.7,0) 12(12.7,2.54) 13(15.24,0) 14(15.24,2.54) 15(17.78,0) 16(17.78,2.54) 17(20.32,0) 18(20.32,2.54) 19(22.86,0) 20(22.86,2.54) 21(25.4,0) 22(25.4,2.54) 23(27.94,0) 24(27.94,2.54) 25(30.48,0) 26(30.48,2.54) 27(33.02,0) 28(33.02,2.54) 29(35.56,0) 30(35.56,2.54) 31(38.1,0) 32(38.1,2.54)
  silkscreen extent -1.27,-1.27 39.37,3.81
Header1*3 [mm]
  rect 1.5x2 hole 1.1: 1(-0.005,0.022)
  oval 1.5x2 hole 1.1: 2(2.535,0.022) 3(5.075,0.022)
  silkscreen extent -1.28,-1.25 6.47,1.42
"Heat Sink" [mil]
  silkscreen extent 0,0 7874,4927, body extent -1,-1 7874,4927, height 984
"Inductor output" [mm]
  rect 6x6 hole 3.2: 1(-14.622,12.291) 2(16.112,12.291) 3(15.985,-13.744) 4(-14.495,-13.744)
  body extent -17.72,-16.85 19.21,15.39, height 27.94
"Inductor surface mount" [mm]
  rect 8x6 smd: 1(7.047,0.163) 2(-7.431,0.163)
  silkscreen extent -9.97,-8.98 8.95,9.31, body extent -10.1,-9.11 9.08,9.43, height 9.4
Inductor_small [mm]
  round 6 hole 4: 1(-17.272,0.508) 2(17.399,0.508)
  silkscreen extent -21.72,-18.5 21.72,6.6, body extent -21.59,-18.47 21.59,6.73, height 43.18
Inductor_small_mirror [mm]
  round 6 hole 4: 1(-17.526,-7.239) 2(17.145,-7.239)
  silkscreen extent -21.97,-13.33 21.46,13.21, body extent -21.84,-10.43 21.34,4.62, height 43.18
J1-0603 [mm] "Chip Resistor, Body 1.6x0.8mm, IPC High Density"
  rect 0.7x0.9 smd: 1(-0.75,0) 2(0.75,0)
  silkscreen extent -0.2,-0.35 0.2,0.35, body extent -0.85,-0.48 0.85,0.48, height 0.9
MEJ2 [mm]
  round 1.5 hole 0.7: 1(2.95,2.5) 2(5.5,2.5) 5(12.95,2.5) 7(18.025,2.5)
  silkscreen extent 0,-4.95 19.65,5, body extent -0.05,-5 19.7,5.05, height 9.24
MMSZ5221BS [mm] "SODFL, 2-Leads, Body 1.30x2.50mm, IPC Medium Density"
  rect 0.59x0.45 smd: 1(0,0) 2(4.05,0)
  silkscreen extent 0.62,-0.68 2.87,0.72, body extent 1.07,-0.68 2.87,0.72, height 1
NMH1209SC [mm]
  round 2 hole 0.8: 1(0,0) 2(2.54,0) 4(7.62,0) 5(10.16,0) 6(12.7,0)
  round 1.5 on Top Overlay: 15(-0.889,-4.826)
  silkscreen extent -2,-6.16 17.5,1.34
"Output cap" [mm]
  rect 3.4x2 smd: 1(0.254,-2.402) 2(0.254,2.198)
  silkscreen extent -1.65,-3.53 2.16,3.33, body extent -1.78,-3.66 2.29,3.45, height 3.3
"P-Terminal 2" [mm]
  rect 2.75x2.75 hole 1.3: 1(-0.914,5.004)
  round 2.75 hole 1.3: 2(-0.914,-4.521)
  silkscreen extent -6.55,-9.35 6.02,9.79
"P-terminal 3" [mm]
  rect 2.75x2.75 hole 1.3: 1(-0.331,-9.829)
  round 2.75 hole 1.3: 2(-0.331,-0.309) 3(-0.331,9.211)
  silkscreen extent -6.63,-14.62 5.94,14
PCB_CONNECTOR [mil]
  round 80 hole 45: 0(-100.43,100) 1(99.57,100) 2(99.57,-100) 3(-100.43,-100)
  round 120 hole 70: 4(-0.43,0)
  silkscreen extent -155,-155 155,155
PCBComponent_1 [mil]
  round 80 hole 45: 0(-100,100) 1(100,100) 2(100,-100) 3(-100,-100)
  round 120 hole 70: 4(0,0)
  silkscreen extent -155,-155 155,155
PMEG2010EPK [mm]
  rect 0.95x0.7 smd: 0(0.508,0.37)
  rect 0.55x0.7 smd: 1(1.558,0.37)
Pot [mm] "3296W-1-253LF"
  round 1.2 hole 0.7: 1(0,0) 2(2.54,0) 3(5.08,0)
  silkscreen extent -2.28,-2.65 7.27,2.37
Power_main [mm]
  round 2 hole 0.8: 2(-12.065,-8.255) 3(-9.525,-8.255) 9(5.715,-8.255) 11(10.795,-8.255) 14(10.795,6.985) 16(5.715,6.985) 22(-9.525,6.985) 23(-12.065,6.985)
  silkscreen extent -17.27,-10.67 15.37,9.4, body extent -17.27,-10.67 15.37,9.4, height 10.52
"Push Button _New" [mm]
  round 1.7 hole 0.7: 1(0,0) 1(14,0) 2(0,14) 2(14,14)
  silkscreen extent -1.24,-0.97 15.14,15.04
"Reg SOT-89" [mm]
  rect 1.5x0.6 smd: 1(4.25,-1.57) 3(4.25,1.57) 4(4.25,0)
  rect 1.5x1.83 smd: 4(0,0)
  round 1 on Top Overlay: 5(2.413,-1.651)
  silkscreen extent 1.02,-2.41 3.17,2.41
"Reg SOT-89 +5" [mm]
  rect 1.5x0.6 smd: 1(4.25,-1.57) 2(4.25,0) 3(4.25,1.57)
  rect 1.5x1.83 smd: 2(0,0)
  round 1 on Top Overlay: 5(2.413,-1.651)
  silkscreen extent 1.02,-2.41 3.17,2.41
Res-RS [mm]
  rect 2x2 hole 1.6: 1(2.794,2.667) 2(-5.715,2.667)
  rect 4x2 smd: 1(2.794,2.667) 2(-5.715,2.667)
  rect 4x2 smd far side: 1(2.794,2.667) 2(-5.715,2.667)
  silkscreen extent -8.25,-17.37 5.1,5.97
res_smd [mm]
  rect 1.3x1.5 smd: 1(-0.95,0) 2(0.95,0)
  silkscreen extent -1.78,-0.89 1.78,0.89, body extent -1.7,-0.85 1.7,0.85, height 2.54
Res_Snub [mm]
  rect 2x2 hole 1.6: 1(0,0) 2(5.08,0)
  rect 2x4 smd: 1(0,0) 2(5.08,0)
  rect 2x4 smd far side: 1(0,0) 2(5.08,0)
  silkscreen extent -3.43,-3.3 8.51,26.29, body extent -3.43,4.19 8.51,26.29, height 5.03
"Sense resistor" [mm] "WSL3637"
  rect 2.95x7.62 smd: 1(-0.025,0) 2(7.47,0)
  rect 2.95x1.68 smd: 3(0,5.26) 4(7.495,5.26)
  silkscreen extent -2.1,-4.4 9.45,6.83
"SO8 TS27l2" [mm]
  rect 2x0.5 smd: 1(-3.1,1.905) 2(-3.1,0.635) 3(-3.1,-0.635) 4(-3.1,-1.905) 5(3.1,-1.905) 6(3.1,-0.635) 7(3.1,0.635) 8(3.1,1.905)
  round 1 on Top Overlay: 9(-1.016,1.651)
  silkscreen extent -1.91,-2.54 1.91,2.54
SOIC127P600X168_HS-9N [mm] "MAX9919NASA+"
  rect 1.45x0.6 smd: 1(-2.725,1.905) 2(-2.725,0.635) 3(-2.725,-0.635) 4(-2.725,-1.905) 5(2.725,-1.905) 6(2.725,-0.635) 7(2.725,0.635) 8(2.725,1.905)
  rect 2.43x3.17 smd: 9(0,0)
  silkscreen extent -2.85,-2.5 1.6,2.88, body extent -2,-2.5 2,2.5, height 1.68
"SOIC 8_ no EP" [mm]
  rect 1.45x0.6 smd: 1(-2.75,1.93) 2(-2.75,0.66) 3(-2.75,-0.61) 4(-2.75,-1.88) 5(2.7,-1.88) 6(2.7,-0.61) 7(2.7,0.66) 8(2.7,1.93)
  silkscreen extent -2.87,-2.48 1.57,2.9, body extent -2.03,-2.48 1.97,2.52, height 1.68
SOIC-8 [mm]
  rect 1.55x0.6 smd: 1(-1.825,2.275) 2(-1.825,1) 3(-1.825,-0.275) 4(-1.825,-1.55) 5(3.575,-1.55) 6(3.575,-0.275) 7(3.575,1) 8(3.575,2.275)
  silkscreen extent -3.2,-2.37 5.38,3.13
SOT-89-5 [mm]
  rect 1x1.5 smd: 1(-1.525,-1.9) 2(-0.125,1) 3(1.475,-1.9)
  rect 0.7x1.5 smd: 4(1.475,1.2) 5(-1.525,1.2)
  Top Layer region: 0.5,-2.65 -0.55,-2.65 -0.55,-0.825 -0.875,-0.5 -0.875,1.95 0.825,1.95 0.825,-0.5 0.5,-0.825
"SR latch" [mm] "SOIC 16"
  rect 1.55x0.6 smd: 1(-2.725,4.445) 2(-2.725,3.175) 3(-2.725,1.905) 4(-2.725,0.635) 5(-2.725,-0.635) 6(-2.725,-1.905) 7(-2.725,-3.175) 8(-2.725,-4.445) 9(2.725,-4.445) 10(2.725,-3.175) 11(2.725,-1.905) 12(2.725,-0.635) 13(2.725,0.635) 14(2.725,1.905) 15(2.725,3.175) 16(2.725,4.445)
  silkscreen extent -2.85,-5 1.6,5.42, body extent -2,-5 2,5, height 1.68
"Test Point" [mm]
  round 1.5 hole 1.2: 1(0,0)
  body extent -0.63,-0.63 0.64,0.63, height 5.08
TO-277A [mm] "Diode"
  rect 1.4x1.27 smd: 1(-1.05,-3.8) 1(1.05,-3.8)
  rect 4.8x4.72 smd: 2(0,0)
  silkscreen extent -2.75,-4.9 2.85,2.7
Transformer [mm]
  rect 3.5x3.5 hole 2.2: 1(-17.653,23.746) 2(-7.874,23.746)
  rect 3.5x3.5 hole 2: 3(5.969,23.746) 4(15.24,23.746)
  round 3 hole 1.5: N(-6.35,-18.027) N(-6.35,17.519) N(3.81,-18.027) N(3.81,17.519)
  silkscreen extent -19.56,-19.68 17.14,19.3, body extent -19.68,-19.81 17.27,19.43, height 38.1
"Zener Diode" [mm]
  rect 1x0.65 smd: 1(-1.2,0.95) 2(-1.2,-0.95) 3(1.2,0)
  silkscreen extent -1.32,-1.5 0.7,1.95, body extent -0.7,-1.5 0.7,1.5, height 1.1